# Altium PCB Module_Type_A_CoreS3_M5_Bus.PcbDoc
Units mm, origin at the board's own origin, x right, y up, seen from the top; angles counter-clockwise.
Board outline 50 x 50 mm, 2 copper layers (Top Layer, Bottom Layer), stack 0.98 mm thick; 1 components, 26 nets, 72 pads, 72 vias.
Unrouted connection lines stored in the file: 32.
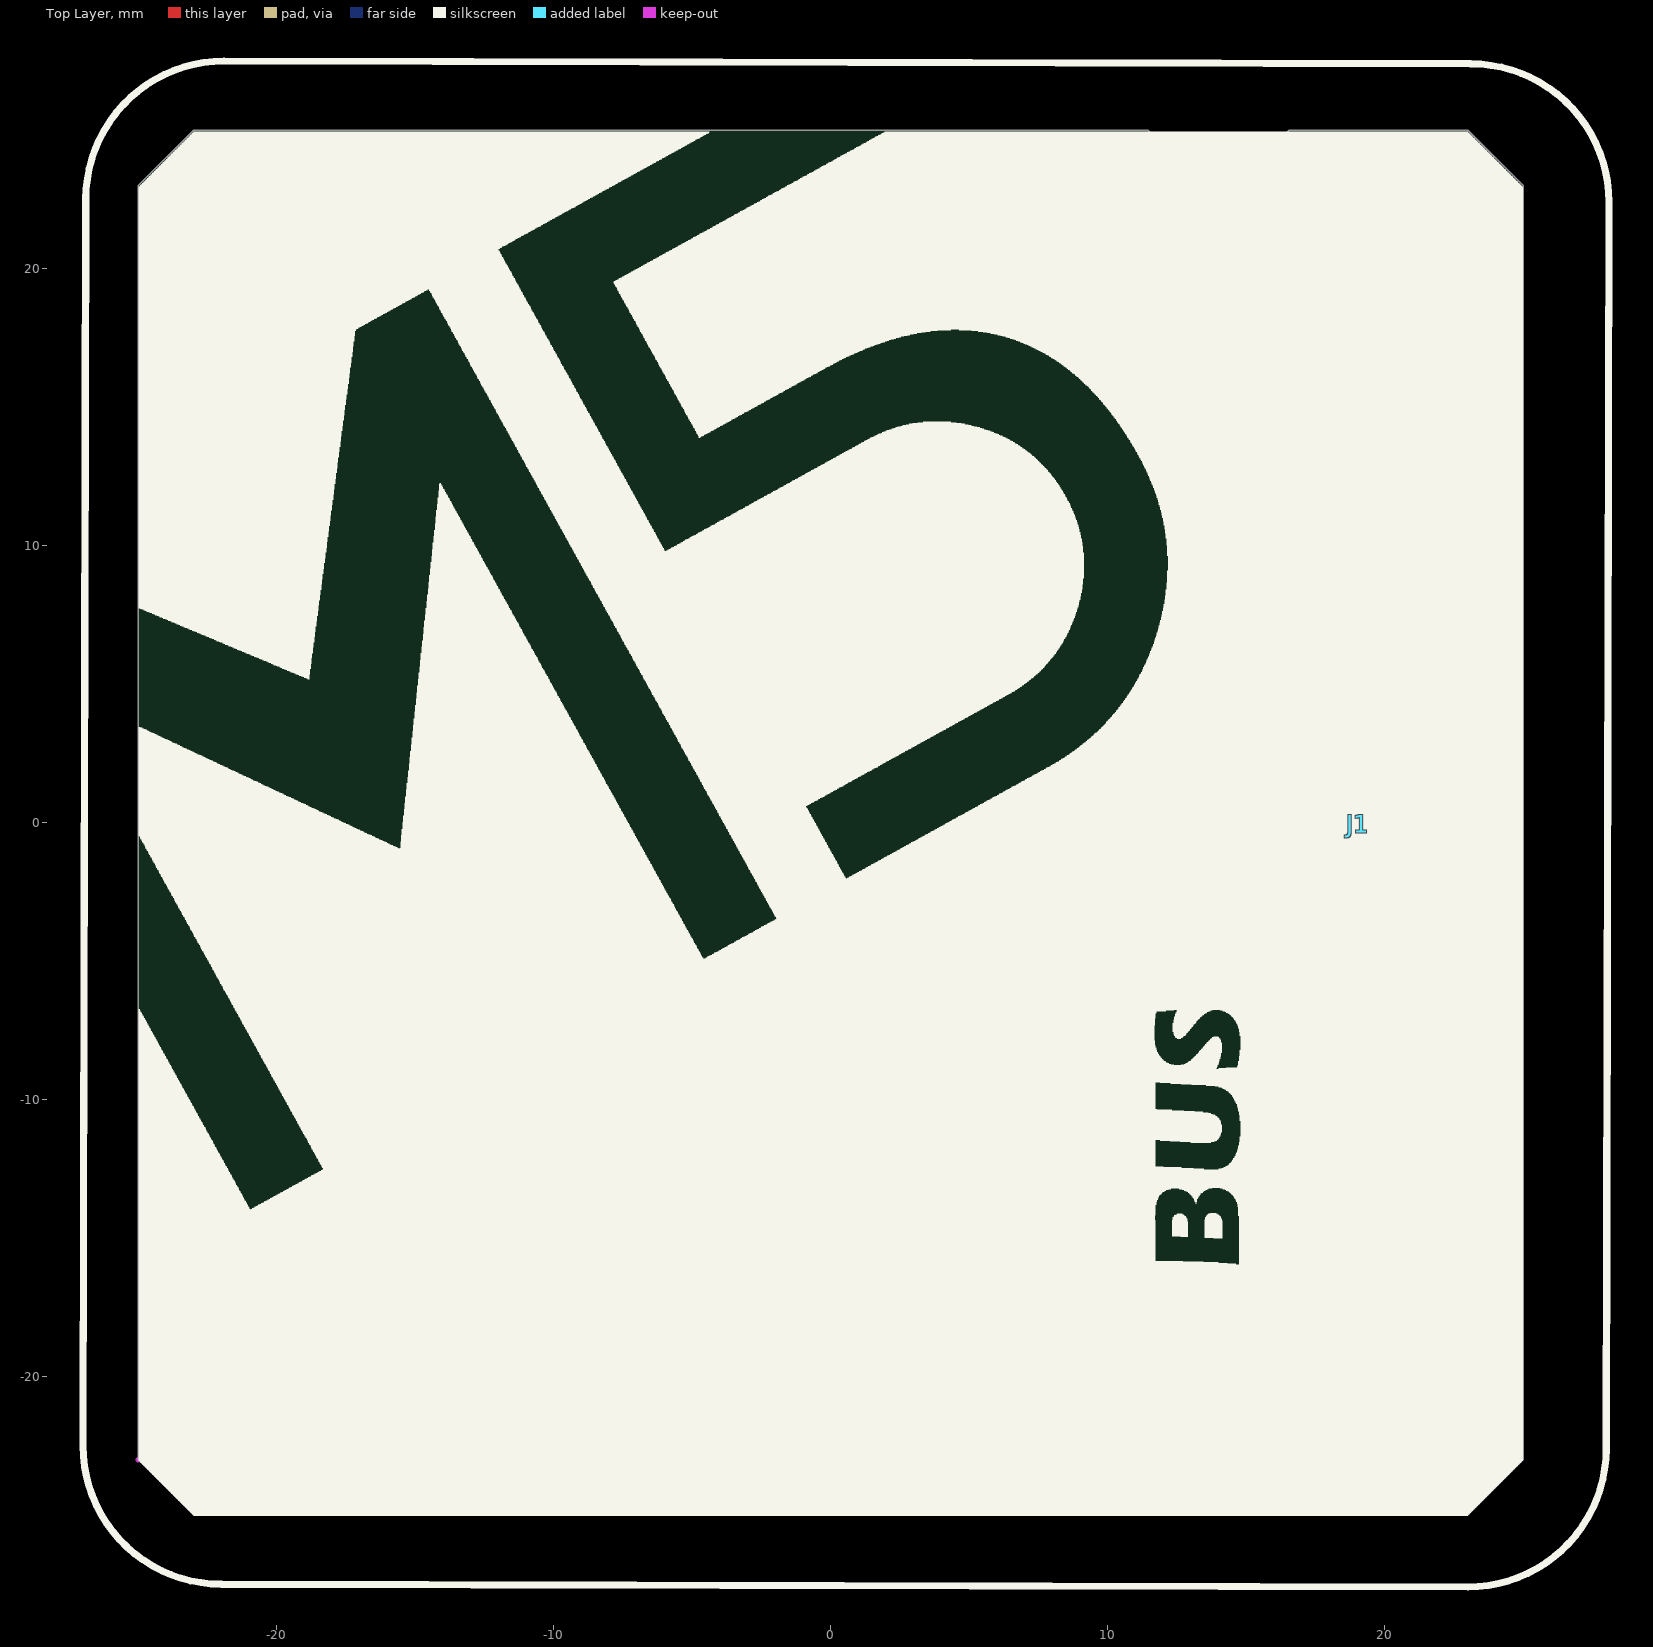
[diagram p0: Top Layer view]
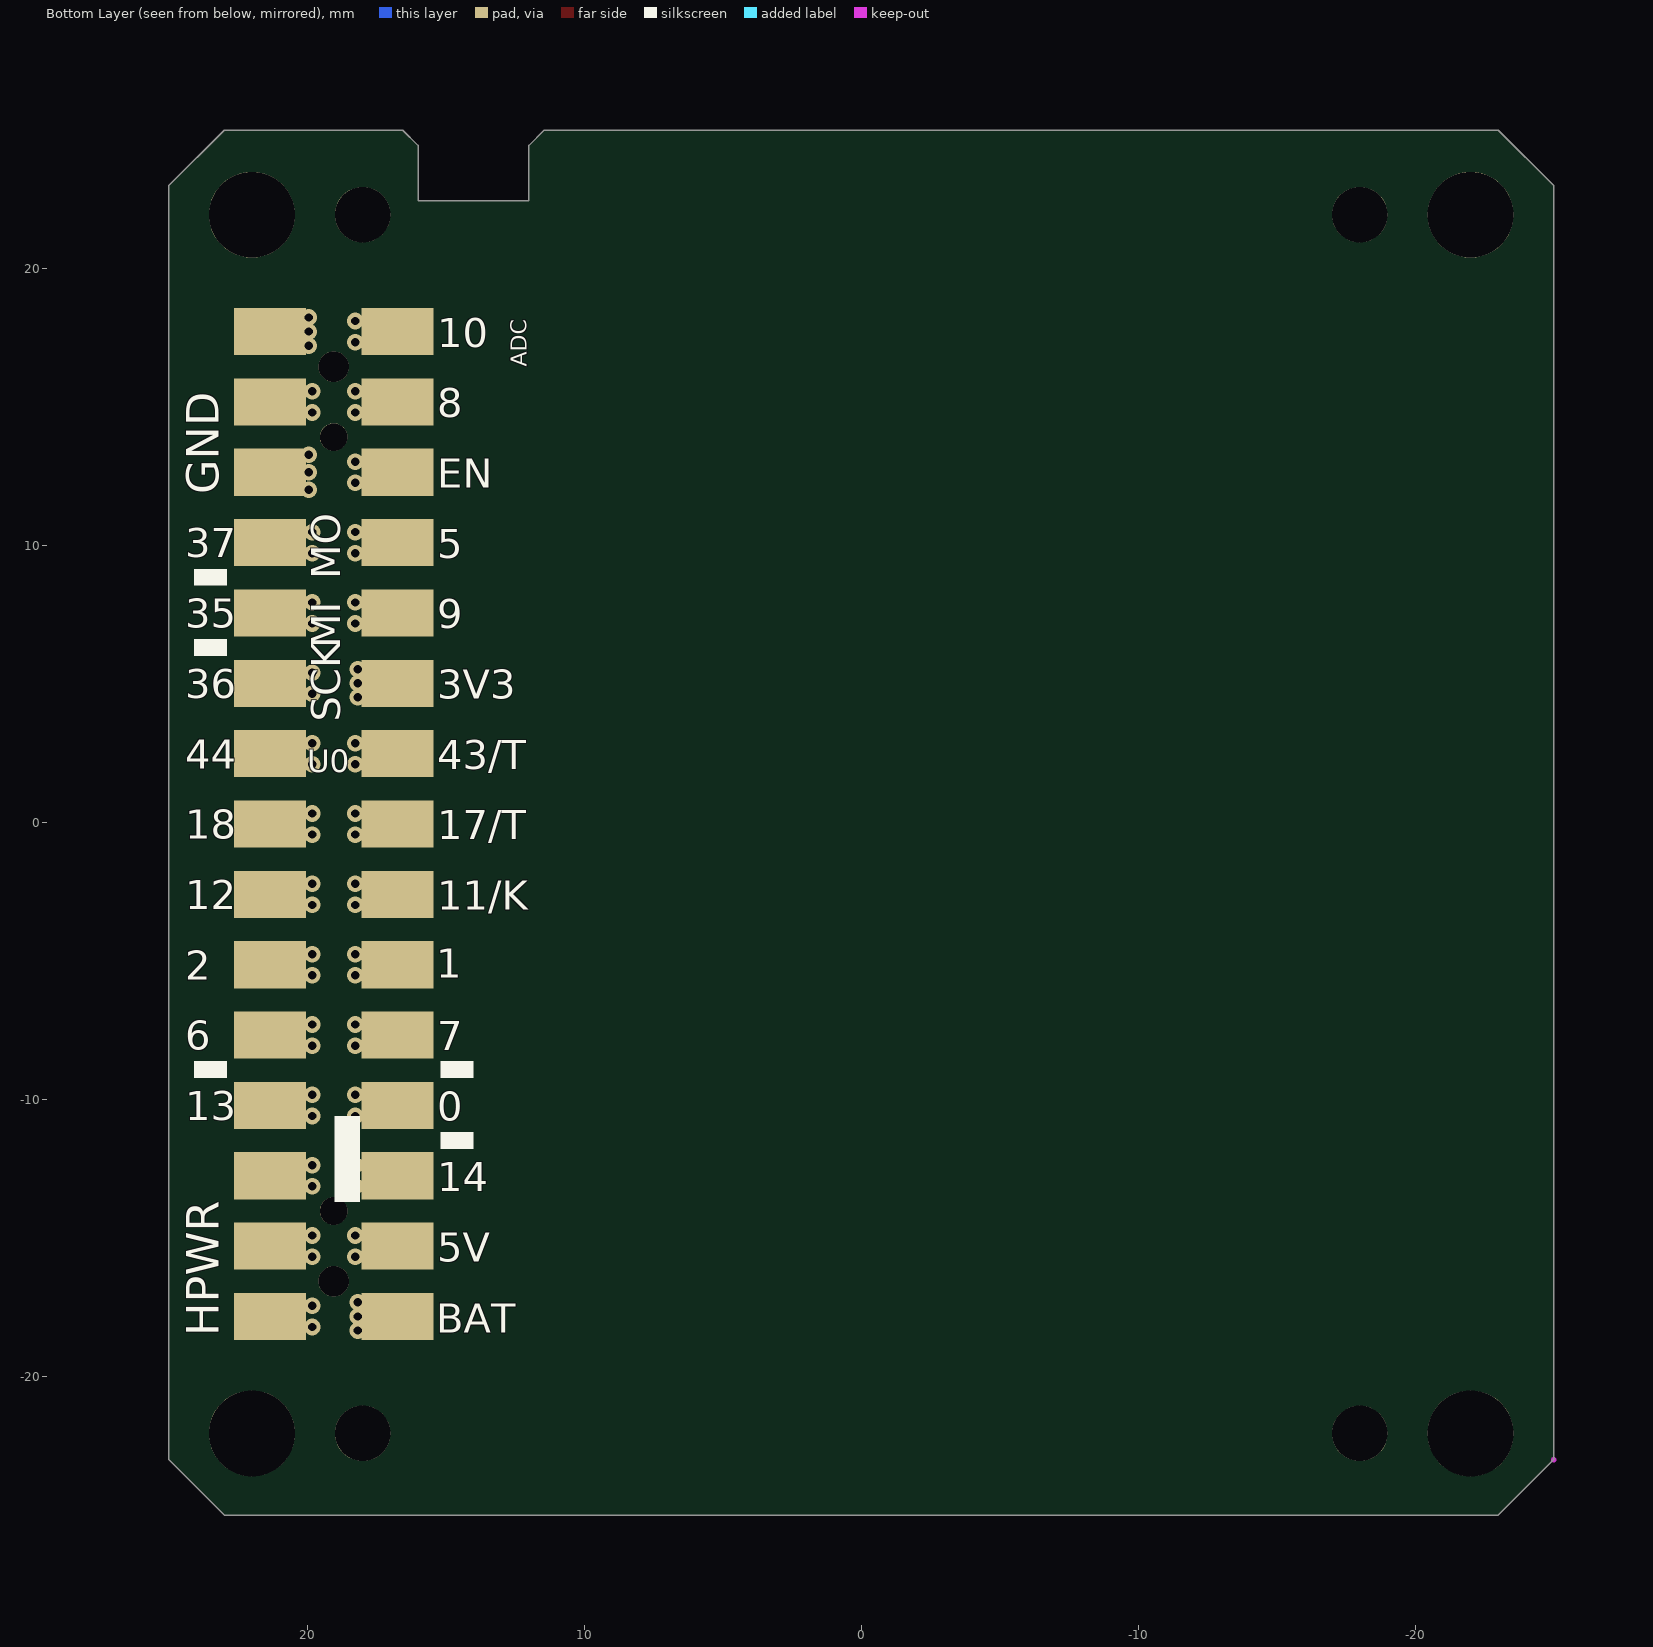
[diagram p1: Bottom Layer view, seen from below]

## Layer stack, top to bottom
Top Solder: solder mask 0.0102, Solder Resist, Dk 3.5
Top Layer: signal copper 0.0356
Dielectric1: dielectric 0.9086, FR-4, Dk 4.8
Bottom Layer: signal copper 0.0356
Bottom Solder: solder mask 0.0102, Solder Resist, Dk 3.5

## Board outline
-25,-23 -23,-25 23,-25 25,-23 25,23 23,25 16.551,25 16,24.449 16,22.449 12,22.449 12,24.449 11.449,25 -23,25 -25,23

## Design rules (kind name [scope] priority, off if disabled: settings)
Clearance [All] p1: gap=0.152 ignorepadtopadclearanceinfootprint=FALSE except(0: Arc-Hole Track-Hole SMDPad-Hole THPad-Hole Via-Hole Fill-Hole Poly-Hole Region-Hole Text-Hole)
PlaneConnect [All] p1: planeconnectstyle=Direct reliefexpansion=0.508 reliefentries=4 reliefconductorwidth=0.254 reliefairgap=0.254
PolygonConnect [All] p1: connectstyle=Direct reliefconductorwidth=0.254 reliefentries=4 polygonreliefangle="90 Angle" airgapwidth=0.254
RoutingVias [All] p1: holewidth=0.711 width=1.27 viastyle="Through Hole" minholewidth=0.711 minwidth=1.27 maxholewidth=0.711 maxwidth=1.27
SolderMaskExpansion [All] p1: expansion=0.102 istentingtop=FALSE
Width [All] p1: maxlimit=0.635 minlimit=0.152 preferedwidth=0.381 minimp=50.000000 maximp=50.000000 favimp=50.000000
29 further rules are at their usual default settings.

## Components (designator, comment, footprint, x,y, rotation, side; value= is the part's Value field where it differs from the comment)
J1 "M5Stack_BUS" M5Stack_BUS_30P 21.35,17.729 r0 top locked

## Footprints (in the part's own frame and the unit in brackets; to place one, negate y for a bottom-side part, rotate by r counter-clockwise, add the part's x,y. Pads: shape width x height; smd on the part's side, far side on the other; paste and mask are expansions set on the pad)
M5Stack_BUS_30P [mm]
  round 1 hole 1: 0(-2.3,-3.81) 0(-2.3,-31.75)
  round 1.1 hole 1.1: 0(-2.3,-1.27) 0(-2.3,-34.29)
  rect 2.6x1.7 smd: 1(0,0) 2(-4.6,0) 3(0,-2.54) 4(-4.6,-2.54) 5(0,-5.08) 6(-4.6,-5.08) 7(0,-7.62) 8(-4.6,-7.62) 9(0,-10.16) 10(-4.6,-10.16) 11(0,-12.7) 12(-4.6,-12.7) 13(0,-15.24) 14(-4.6,-15.24) 15(0,-17.78) 16(-4.6,-17.78) 17(0,-20.32) 18(-4.6,-20.32) 19(0,-22.86) 20(-4.6,-22.86) 21(0,-25.4) 22(-4.6,-25.4) 23(0,-27.94) 24(-4.6,-27.94) 25(0,-30.48) 26(-4.6,-30.48) 27(0,-33.02) 28(-4.6,-33.02) 29(0,-35.56) 30(-4.6,-35.56)
  rect 2.6x1.7 smd far side: 1(0,0) 2(-4.6,0) 3(0,-2.54) 4(-4.6,-2.54) 5(0,-5.08) 6(-4.6,-5.08) 7(0,-7.62) 8(-4.6,-7.62) 9(0,-10.16) 10(-4.6,-10.16) 11(0,-12.7) 12(-4.6,-12.7) 13(0,-15.24) 14(-4.6,-15.24) 15(0,-17.78) 16(-4.6,-17.78) 17(0,-20.32) 18(-4.6,-20.32) 19(0,-22.86) 20(-4.6,-22.86) 21(0,-25.4) 22(-4.6,-25.4) 23(0,-27.94) 24(-4.6,-27.94) 25(0,-30.48) 26(-4.6,-30.48) 27(0,-33.02) 28(-4.6,-33.02) 29(0,-35.56) 30(-4.6,-35.56)

## Free pads (board coordinates)
  round 3.1 hole 3.1: 0(-22,-22.051) 0(-22,21.949) 0(22,-22.051) 0(22,21.949)
  round 2 hole 2: 0(-18,-22.051) 0(-18,21.949) 0(18,-22.051) 0(18,21.949)

## Via types
v1: diameter 0.6, hole 0.3, Top Layer to Bottom Layer, tented both sides, 72 vias

## Nets (pads, with @x,y where several pads share a name; then routed paths per layer and width w, separated by ;. In a path a pad name is that pad's centre, name@x,y a point inside that pad or via, vN(x,y) a via of type N, cw(c..) or ccw(c..) an arc to the next point about the centre after c; other vN are vias at no path point)
3.3V: J1.12
  other v1: 18.175,4.521 18.175,5.029 18.175,5.537
5V: J1.28
  other v1: 18.274,-15.672 18.274,-14.91
BATTERY: J1.30
  other v1: 18.175,-18.339 18.175,-17.831 18.175,-17.323
EN: J1.6
  other v1: 18.274,12.268 18.274,12.268 18.274,13.03 18.274,13.03
GND: J1.1 J1.3 J1.5
  other v1: 19.953,12.014 19.953,12.649 19.953,13.284 19.826,14.808 19.826,15.57 19.953,17.221 19.953,17.729 19.953,18.237
GPIO0: J1.24
  other v1: 18.274,-10.592 18.274,-9.83
GPIO1: J1.14
  other v1: 18.274,2.108 18.274,2.87
GPIO2: J1.19
  other v1: 19.826,-5.512 19.826,-4.75
GPIO3: J1.13
  other v1: 19.826,2.108 19.826,2.87
GPIO5: J1.20
  other v1: 18.274,-5.512 18.274,-4.75
GPIO12: J1.21
  other v1: 19.826,-8.052 19.826,-7.29
GPIO13: J1.22
  other v1: 18.274,-8.052 18.274,-7.29
GPIO15: J1.23
  other v1: 19.826,-10.592 19.826,-9.83
GPIO16: J1.15
  other v1: 19.826,-0.432 19.826,0.33
GPIO17: J1.16
  other v1: 18.274,-0.432 18.274,0.33
GPIO18: J1.11
  other v1: 19.826,4.648 19.826,5.41
GPIO19: J1.9
  other v1: 19.826,7.188 19.826,7.188 19.826,7.95 19.826,7.95
GPIO21: J1.17
  other v1: 19.826,-2.972 19.826,-2.21
GPIO22: J1.18
  other v1: 18.274,-2.972 18.274,-2.21
GPIO23: J1.7
  other v1: 19.826,9.728 19.826,9.728 19.826,10.49 19.826,10.49
GPIO25: J1.8
  other v1: 18.274,9.728 18.274,9.728 18.274,10.49 18.274,10.49
GPIO26: J1.10
  other v1: 18.274,7.188 18.274,7.95
GPIO34: J1.26
  other v1: 18.274,-13.132 18.274,-12.37
GPIO35: J1.2
  other v1: 18.274,17.348 18.274,18.11
GPIO36: J1.4
  other v1: 18.274,14.808 18.274,15.57
HPWR: J1.25 J1.27 J1.29
  other v1: 19.826,-18.212 19.826,-17.45 19.826,-15.672 19.826,-14.91 19.826,-13.132 19.826,-12.37
pads on no net: J1.0

## Keep-outs
Keep-Out Layer:
  lines w0.2: -25,-23 -25,-23

## Silkscreen, mask and mechanical layers (free items; w line width, h text height)
Top Overlay:
  drawing of 5558 lines, arcs and shapes, not listed
Mechanical 1:
  lines w0.127: -25,-23 -25,23 -23,25 11.449,25 12,24.449 12,22.449 16,22.449 16,24.449 16.551,25 23,25 25,23 25,-23 23,-25 -23,-25 -25,-23 ; 0,-25 0,-25

## Dimensions
23.1,27.4 to 23,-27.6 on Top Overlay

## Text inside footprints (layer, text, board x,y; h text height)
J1: Bottom Overlay "10" at 15.3,16.829 h1.8; Bottom Overlay "1" at 15.35,-5.951 h1.8; Bottom Overlay "EN" at 15.3,11.749 h1.8; Bottom Overlay "18" at 24.4,-0.931 h1.8; Bottom Overlay "11/K" at 15.3,-3.491 h1.8; Bottom Overlay "17/T" at 15.3,-0.951 h1.8; Bottom Overlay "ADC" at 11.875,16.459 h1 r270; Bottom Overlay "9" at 15.3,6.669 h1.8; Bottom Overlay "5" at 15.3,9.209 h1.8; Bottom Overlay "13" at 24.4,-11.091 h1.8; Bottom Overlay "35" at 24.4,6.689 h1.8; Bottom Overlay "GND" at 22.8,11.849 h2 r270; Bottom Overlay "SCK" at 18.475,3.649 h1.8 r270; Bottom Overlay "MO" at 18.475,8.789 h1.8 r270; Bottom Overlay "14" at 15.3,-13.651 h1.8; Bottom Overlay "7" at 15.3,-8.571 h1.8; Bottom Overlay "U0" at 20,1.549 h1.4; Bottom Overlay "8" at 15.3,14.289 h1.8; Bottom Overlay "0" at 15.3,-11.111 h1.8; Bottom Overlay "HPWR" at 22.8,-18.551 h2 r270; Bottom Overlay "3V3" at 15.3,4.129 h1.8; Bottom Overlay "2" at 24.4,-6.011 h1.8; Bottom Overlay "44" at 24.4,1.609 h1.8; Bottom Overlay "12" at 24.4,-3.471 h1.8; Bottom Overlay "5V" at 15.3,-16.191 h1.8; Bottom Overlay "6" at 24.4,-8.551 h1.8; Bottom Overlay "37" at 24.4,9.229 h1.8; Bottom Overlay "MI" at 18.475,6.289 h1.8 r270; Bottom Overlay "36" at 24.4,4.149 h1.8; Bottom Overlay "43/T" at 15.3,1.589 h1.8; Bottom Overlay "BAT" at 15.342,-18.771 h1.8